# Altium PCB Tag.PcbDoc
Units mil, origin at the board's own origin, x right, y up, seen from the top; angles counter-clockwise.
Board outline 905.51 x 1657.48 mil, 2 copper layers (Top Layer, Bottom Layer); 19 components, 19 nets, 152 pads, 73 vias.
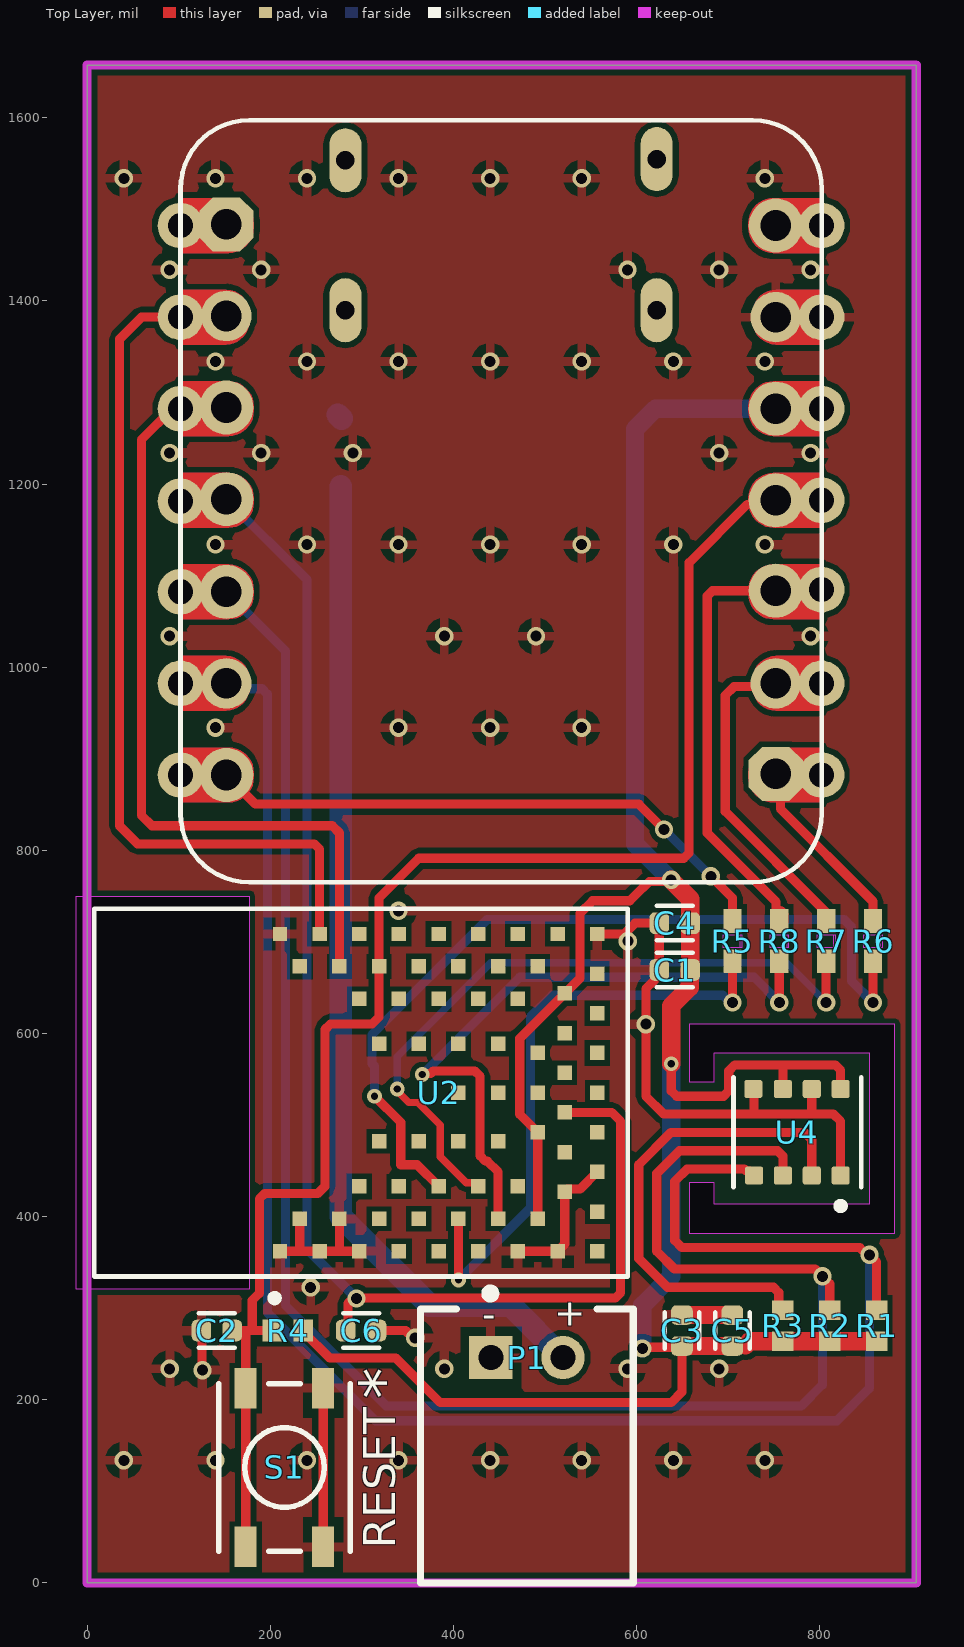
[diagram p0: Top Layer view]
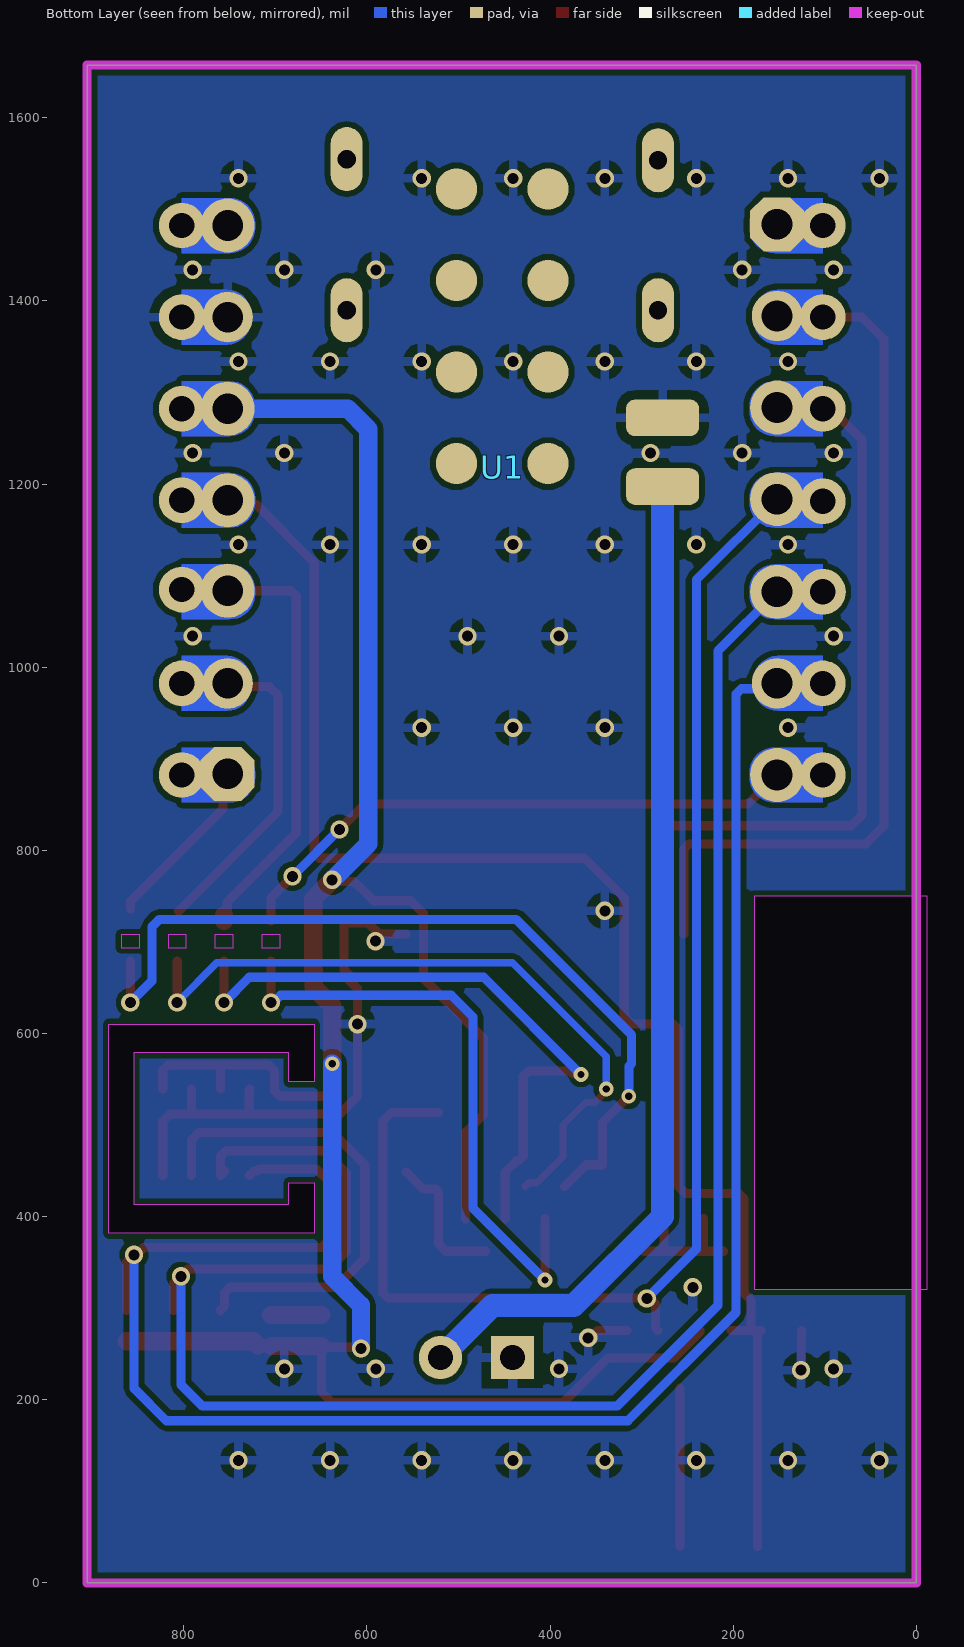
[diagram p1: Bottom Layer view, seen from below]
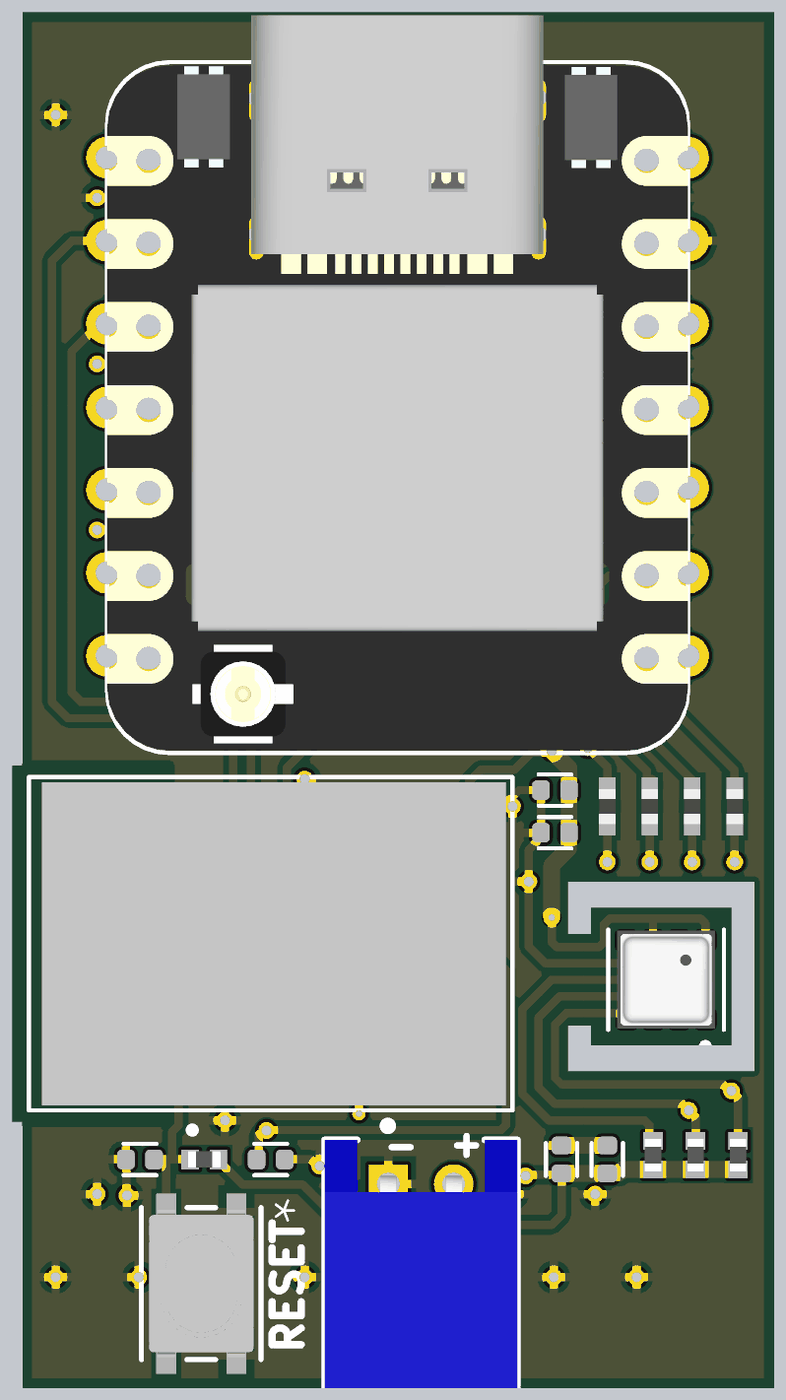
[diagram p2: 3D render of the assembled board from above, using the file's embedded part models]

## Layer stack, top to bottom
Top Solder: solder mask 0.4, Solder Resist, Dk 3.5
Top Layer: signal copper 1.4
Dielectric 1: dielectric 12.6, FR-4, Dk 4.8
Bottom Layer: signal copper 1.4
Bottom Solder: solder mask 0.4, Solder Resist, Dk 3.5

## Board outline
0,1657.48 905.51,1657.48 905.51,0 0,0
cut-out: 685.04,547.24 685.04,578.74 854.33,578.74 854.33,413.39 685.04,413.39 685.04,437.01 657.48,437.01 657.48,381.89 881.89,381.89 881.89,610.24 657.48,610.24 657.48,547.24
cut-out: 177.17,320.87 -11.81,320.87 -11.81,750 177.17,750

## Design rules (kind name [scope] priority, off if disabled: settings)
Clearance [All] p1: gap=6 ignorepadtopadclearanceinfootprint=TRUE
ComponentClearance [All] p1 off: gap=10 collisioncheckmode=3 verticalgap=10 showdistances=FALSE
Height [All] p1 off: minheight=0 maxheight=1000 prefheight=500
HoleToHoleClearance [All] p1: gap=4 allowstackedmicrovias=TRUE
MinimumSolderMaskSliver [All] p1 off: minsoldermaskwidth=4
PolygonConnect [All] p1: connectstyle=Relief reliefconductorwidth=10 reliefentries=4 polygonreliefangle="90 Angle" airgapwidth=10
RoomDefinition Tag [InComponentClass('Tag')] p1 off: confinementstyle=ConfineIn formatcopy=TRUE lockcomponents=FALSE outline -17.09,-1030.67 4167.91,-1030.67 4167.91,-15.67 -17.09,-15.67
RoutingVias [All] p1: holewidth=12 width=20 viastyle="Through Hole" minholewidth=12 minwidth=20 maxholewidth=12 maxwidth=20
SilkToSilkClearance [All] p1 off: silktosilkclearance=4
SilkToSolderMaskClearance [IsPad] p1 off: minsilkscreentomaskgap=4 clearancetoexposedcopper=TRUE
SolderMaskExpansion [All] p1: expansion=4 istentingtop=FALSE
Width [All] p1: maxlimit=30 minlimit=8 preferedwidth=20
24 further rules are at their usual default settings.

## Components (designator, comment, footprint, x,y, rotation, side; value= is the part's Value field where it differs from the comment)
C1 "CL05B104KP5NNNC" CAPC1005X55N 641.73,669.29 r180 top
C2 "CL05B104KP5NNNC" CAPC1005X55N 141.73,275.59 r180 top
C3 "CL05B104KP5NNNC" CAPC1005X55N 649.61,275.59 r90 top
C4 "CL05B104KP5NNNC" CAPC1005X55N 641.73,720.47 r180 top
C5 "CL05B104KP5NNNC" CAPC1005X55N 704.72,275.59 r90 top
C6 "CL05B104KP5NNNC" CAPC1005X55N 299.21,275.59 r0 top
P1 "S2B-PH-K-S(LF)(SN)" JST-S2B-PH-K-S_V 480.32,149.61 r0 top
R1 "RC1005F103CS" RESC1005X40N 862.2,280.79 r270 top
R2 "RC1005F103CS" RESC1005X40N 811.02,280.79 r270 top
R3 "RC1005F103CS" RESC1005X40N 759.84,280.79 r90 top
R4 "RC1005F103CS" RESC1005X40N 219.21,275.59 r180 top
R5 "0ohm" RC0402N_YAG 704.72,700.79 r90 top
R6 "0ohm" RC0402N_YAG 858.27,700.79 r90 top
R7 "0ohm" RC0402N_YAG 807.09,700.79 r90 top
R8 "0ohm" RC0402N_YAG 755.91,700.79 r90 top
S1 "PTS815 SJK 250 SMTR LFS" "SWITCH_SMTR LFS" 215.55,126.1 r270 top
U1 "XIAO ESP32S3" XIAO_ESP32S3 152.05,1483.51 r0 top
U2 "BM833" XCVR_BM833 303.15,535.43 r90 top
U4 "BME680" PSON80P300X300X100-8N 775.59,492.13 r270 top

## Footprints (in the part's own frame and the unit in brackets; to place one, negate y for a bottom-side part, rotate by r counter-clockwise, add the part's x,y. Pads: shape width x height; smd on the part's side, far side on the other; paste and mask are expansions set on the pad)
CAPC1005X55N [mm]
  rrect53% 0.54x0.6 smd: 1(-0.43,0) 2(0.43,0)
  silkscreen extent -0.5,-0.48 0.5,0.48
JST-S2B-PH-K-S_V [mm] "THD, 2-Leads, Body 7.6x5.9mm, Pitch 2mm"
  rect 1.2x1.2 hole 0.7: 1(-1,2.45)
  round 1.2 hole 0.7: 2(1,2.45)
  silkscreen extent -2.95,-3.8 2.95,4.35, body extent -2.95,-3.8 2.95,3.8, height 4.8
PSON80P300X300X100-8N [mm]
  rrect25% 0.5x0.5 smd: 1(1.2,1.2) 2(1.2,0.4) 3(1.2,-0.4) 4(1.2,-1.2) 5(-1.2,-1.22) 6(-1.2,-0.4) 7(-1.2,0.4) 8(-1.2,1.2)
  silkscreen extent -1.53,-1.77 2.14,1.77, body extent -1.5,-1.5 1.5,1.5, height 1
RC0402N_YAG [mil]
  rect 26x20 smd paste+0 mask+0: 1(-22,0) 2(22,0)
  Top Layer keep-out region: -7,-8 -7,8 7,8 7,-8
  Keep-Out Layer region: -7,-10 -7,10 7,10 7,-10
  body extent -21,-10 21,10, height 28
RESC1005X40N [mm]
  rect 0.54x0.6 smd: 1(-0.432,0) 2(0.432,0)
  body extent -0.5,-0.25 0.5,0.25, height 0.4
"SWITCH_SMTR LFS" [mil]
  rect 44x24 smd paste+0 mask+0: 1(-86.5,42.32) 2(86.5,42.32) 3(-86.5,-42.32) 4(86.5,-42.32)
  silkscreen extent -92,-72 92,72, body extent -89,-63 89,63, height 98
XCVR_BM833 [mm]
  rect 0.4x0.4 smd: 1(-4.4,2.35) 2(-3.5,1.8) 3(-4.4,1.25) 4(-3.5,0.7) 5(-4.4,0.15) 6(-3.5,-0.4) 7(-4.4,-0.95) 8(-3.5,-1.5) 9(-4.4,-2.05) 10(-3.5,-2.6) 11(-4.4,-3.15) 12(-3.5,-3.7) 13(-4.4,-4.25) 14(-3.5,-4.8) 15(-4.4,-5.35) 16(-4.4,-6.45) 17(-3.3,-6.45) 18(-2.75,-5.55) 19(-2.2,-6.45) 20(-1.65,-5.55) 21(-1.1,-6.45) 22(-0.55,-5.55) 23(0,-6.45) 24(0.55,-5.55) 25(1.1,-6.45) 26(1.65,-5.55) 27(2.2,-6.45) 28(2.75,-5.55) 29(3.3,-6.45) 30(4.4,-6.45) 31(4.4,-5.35) 32(3.5,-4.8) 33(4.4,-4.25) 34(3.5,-3.7) 35(4.4,-3.15) 36(3.5,-2.6) 37(4.4,-2.05) 38(3.5,-1.5) 39(4.4,-0.95) 40(3.5,-0.4) 41(4.4,0.15) 42(3.5,0.7) 43(4.4,1.25) 44(3.5,1.8) 45(4.4,2.35) 46(1.35,-0.4) 47(-1.35,-0.4) 48(-2.6,0.15) 49(-2.6,-0.95) 50(-1.35,-1.5) 51(-2.6,-2.05) 52(-1.35,-2.6) 53(-2.6,-3.15) 54(-1.35,-3.7) 55(-2.6,-4.25) 56(-1.1,-4.8) 57(0,-4.8) 58(1.1,-4.8) 59(2.6,-4.25) 60(1.35,-3.7) 61(2.6,-3.15) 62(1.35,-2.6) 63(2.6,-2.05) 64(1.35,-1.5) 65(2.6,-0.95) 66(2.6,0.15) 67(0,-3.7) 68(0,-2.6)
  silkscreen extent -5.8,-7.3 5.1,7.5, body extent -4.95,-7.1 4.95,7.1, height 2
XIAO_ESP32S3 [mil]
  round 50 hole 27.56: 1(-50,-1.25) 2(-50,-101.25) 3(-50,-201.25) 4(-50,-302.3) 5(-50,-401.25) 6(-50,-501.25) 7(-50,-601.25) 8(650,-601.25) 9(650,-501.25) 10(650,-398.79) 11(650,-301.25) 12(650,-201.25) 13(650,-101.25) 14(650,-1.25)
  oct 59.06x59.06 / inner round 54.56 / far side oct 59.06x59.06 hole 33.46: 1(0,0) 8(600,-600)
  round 55.12 hole 33.46: 2(0,-100) 6(0,-501.25) 9(600,-501.25) 13(600,-101.25)
  round 59.06 hole 33.46: 3(0,-200) 4(0,-300) 5(0,-401.25) 7(0,-601.25) 10(600,-400) 11(600,-301.25) 12(600,-201.25) 14(600,-1.25)
  rrect100% 45x45 smd far side paste+0: 15(250,38.75) 16(250,-61.25) 17(250,-161.25) 18(250,-261.25) 19(350,-261.25) 20(350,-161.25) 21(350,-61.25) 22(350,38.75)
  rrect50% 80x40 smd far side: BAT+(125,-286.25) BAT-(125,-211.25)
  oval 35x70 hole 20: S1(470,71.25) S2(130,70) S3(470,-93.75) S4(130,-93.75)
  Top Layer region: 650,-631.25 597.5,-631.25 586.98,-629.16 578.05,-623.2 572.09,-614.27 570,-603.75 570,-603.75 570,-598.75 572.09,-588.23 578.05,-579.3 586.98,-573.34 597.5,-571.25 597.5,-571.25 650,-571.25
  Top Layer region: 650,-531.25 600,-531.25 586.87,-527.21 577.53,-517.14 574.47,-503.75 574.47,-503.75 574.47,-498.75 577.53,-485.36 586.87,-475.29 600,-471.25 600,-471.25 650,-471.25
  Top Layer region: 650,-431.25 597.5,-431.25 586.98,-429.16 578.05,-423.2 572.09,-414.27 570,-403.75 570,-403.75 570,-398.75 572.09,-388.23 578.05,-379.3 586.98,-373.34 597.5,-371.25 597.5,-371.25 650,-371.25
  Top Layer region: 650,-331.25 597.5,-331.25 586.98,-329.16 578.05,-323.2 572.09,-314.27 570,-303.75 570,-303.75 570,-298.75 572.09,-288.23 578.05,-279.3 586.98,-273.34 597.5,-271.25 597.5,-271.25 650,-271.25
  Top Layer region: 650,-231.25 597.5,-231.25 586.98,-229.16 578.05,-223.2 572.09,-214.27 570,-203.75 570,-203.75 570,-198.75 572.09,-188.23 578.05,-179.3 586.98,-173.34 597.5,-171.25 597.5,-171.25 650,-171.25
  Top Layer region: 650,-131.25 600,-131.25 586.87,-127.21 577.53,-117.14 574.47,-103.75 574.47,-103.75 574.47,-98.75 577.53,-85.36 586.87,-75.29 600,-71.25 600,-71.25 650,-71.25
  Top Layer region: 650,-31.25 597.5,-31.25 586.98,-29.16 578.05,-23.2 572.09,-14.27 570,-3.75 570,-3.75 570,1.25 572.09,11.77 578.05,20.7 586.98,26.66 597.5,28.75 597.5,28.75 650,28.75
  Top Layer region: -50,28.75 2.5,28.75 13.02,26.66 21.95,20.7 27.91,11.77 30,1.25 30,1.25 30,-3.75 27.91,-14.27 21.95,-23.2 13.02,-29.16 2.5,-31.25 2.5,-31.25 -50,-31.25
  Top Layer region: -50,-71.25 0,-71.25 13.13,-75.29 22.47,-85.36 25.53,-98.75 25.53,-98.75 25.53,-103.75 23.89,-113.97 18.46,-122.79 10.07,-128.85 0,-131.25 0,-131.25 -50,-131.25
  Top Layer region: -50,-171.25 2.5,-171.25 13.02,-173.34 21.95,-179.3 27.91,-188.23 30,-198.75 30,-198.75 30,-203.75 27.91,-214.27 21.95,-223.2 13.02,-229.16 2.5,-231.25 2.5,-231.25 -50,-231.25
  Top Layer region: -50,-271.25 2.5,-271.25 13.02,-273.34 21.95,-279.3 27.91,-288.23 30,-298.75 30,-298.75 30,-303.75 27.91,-314.27 21.95,-323.2 13.02,-329.16 2.5,-331.25 2.5,-331.25 -50,-331.25
  Top Layer region: -50,-371.25 2.5,-371.25 13.02,-373.34 21.95,-379.3 27.91,-388.23 30,-398.75 30,-398.75 30,-403.75 27.91,-414.27 21.95,-423.2 13.02,-429.16 2.5,-431.25 2.5,-431.25 -50,-431.25
  Top Layer region: -50,-471.25 0,-471.25 13.13,-475.29 22.47,-485.36 25.53,-498.75 25.53,-498.75 25.53,-503.75 23.89,-513.97 18.46,-522.79 10.07,-528.85 0,-531.25 0,-531.25 -50,-531.25
  Top Layer region: -50,-571.25 2.5,-571.25 13.02,-573.34 21.95,-579.3 27.91,-588.23 30,-598.75 30,-598.75 30,-603.75 27.91,-614.27 21.95,-623.2 13.02,-629.16 2.5,-631.25 2.5,-631.25 -50,-631.25
  Bottom Layer region: 650,-571.25 597.5,-571.25 586.98,-573.34 578.05,-579.3 572.09,-588.23 570,-598.75 570,-598.75 570,-603.75 572.09,-614.27 578.05,-623.2 586.98,-629.16 597.5,-631.25 597.5,-631.25 650,-631.25
  Bottom Layer region: 650,-471.25 600,-471.25 586.87,-475.29 577.53,-485.36 574.47,-498.75 574.47,-498.75 574.47,-503.75 577.53,-517.14 586.87,-527.21 600,-531.25 600,-531.25 650,-531.25
  Bottom Layer region: 650,-371.25 597.5,-371.25 586.98,-373.34 578.05,-379.3 572.09,-388.23 570,-398.75 570,-398.75 570,-403.75 572.09,-414.27 578.05,-423.2 586.98,-429.16 597.5,-431.25 597.5,-431.25 650,-431.25
  Bottom Layer region: 650,-271.25 597.5,-271.25 586.98,-273.34 578.05,-279.3 572.09,-288.23 570,-298.75 570,-298.75 570,-303.75 572.09,-314.27 578.05,-323.2 586.98,-329.16 597.5,-331.25 597.5,-331.25 650,-331.25
  Bottom Layer region: 650,-171.25 597.5,-171.25 586.98,-173.34 578.05,-179.3 572.09,-188.23 570,-198.75 570,-198.75 570,-203.75 572.09,-214.27 578.05,-223.2 586.98,-229.16 597.5,-231.25 597.5,-231.25 650,-231.25
  Bottom Layer region: 650,-71.25 600,-71.25 586.87,-75.29 577.53,-85.36 574.47,-98.75 574.47,-98.75 574.47,-103.75 577.53,-117.14 586.87,-127.21 600,-131.25 600,-131.25 650,-131.25
  Bottom Layer region: 650,28.75 597.5,28.75 586.98,26.66 578.05,20.7 572.09,11.77 570,1.25 570,1.25 570,-3.75 572.09,-14.27 578.05,-23.2 586.98,-29.16 597.5,-31.25 597.5,-31.25 650,-31.25
  Bottom Layer region: -50,-31.25 2.5,-31.25 13.02,-29.16 21.95,-23.2 27.91,-14.27 30,-3.75 30,-3.75 30,1.25 27.91,11.77 21.95,20.7 13.02,26.66 2.5,28.75 2.5,28.75 -50,28.75
  Bottom Layer region: -50,-131.25 0,-131.25 10.07,-128.85 18.46,-122.79 23.89,-113.97 25.53,-103.75 25.53,-103.75 25.53,-98.75 22.47,-85.36 13.13,-75.29 0,-71.25 0,-71.25 -50,-71.25
  Bottom Layer region: -50,-231.25 2.5,-231.25 13.02,-229.16 21.95,-223.2 27.91,-214.27 30,-203.75 30,-203.75 30,-198.75 27.91,-188.23 21.95,-179.3 13.02,-173.34 2.5,-171.25 2.5,-171.25 -50,-171.25
  Bottom Layer region: -50,-331.25 2.5,-331.25 13.02,-329.16 21.95,-323.2 27.91,-314.27 30,-303.75 30,-303.75 30,-298.75 27.91,-288.23 21.95,-279.3 13.02,-273.34 2.5,-271.25 2.5,-271.25 -50,-271.25
  Bottom Layer region: -50,-431.25 2.5,-431.25 13.02,-429.16 21.95,-423.2 27.91,-414.27 30,-403.75 30,-403.75 30,-398.75 27.91,-388.23 21.95,-379.3 13.02,-373.34 2.5,-371.25 2.5,-371.25 -50,-371.25
  Bottom Layer region: -50,-531.25 0,-531.25 10.07,-528.85 18.46,-522.79 23.89,-513.97 25.53,-503.75 25.53,-503.75 25.53,-498.75 22.47,-485.36 13.13,-475.29 0,-471.25 0,-471.25 -50,-471.25
  Bottom Layer region: -50,-631.25 2.5,-631.25 13.02,-629.16 21.95,-623.2 27.91,-614.27 30,-603.75 30,-603.75 30,-598.75 27.91,-588.23 21.95,-579.3 13.02,-573.34 2.5,-571.25 2.5,-571.25 -50,-571.25
  silkscreen extent -50,-718 650,114, body extent -50,-715 650,170, height 166

## Part data
C1 C2 C3 C4 C5 C6: "0.1ÂµF Â±10% 10V Ceramic Capacitor X7R 0402 _1005 Metric_", Package="0402 Samsung", Availability=Unavailable, MF="Samsung Electro-Mechanics", MP=CL05B104KP5NNNC, Price=None, SnapEDA_Link=https://www.snapeda.com/parts/CL05B104KP5NNNC/Samsung%20Electro-Mechanics/view-part/1365387/?ref=snap
P1: library part CMP-1755-00004-1, "Male Header, Pitch 2 mm, 1 x 2 Position, Height 4.8 mm, Tail Length 3.4 mm, -25 to 85 degC, RoHS, Bulk", Capacitance="10 uF", Case\Package=Radial, Max Operating Temperature="85 degC", Min Operating Temperature="-40 degC", Package Quantity=200, Tolerance=20%, Voltage Rating="50 V", ComponentLink1Description=Datasheet, ComponentLink1URL=http://www.jst-mfg.com/product/pdf/eng/ePH.pdf, DatasheetVersion=Dec-12, Diameter="5 mm", Height="11 mm", Lead Pitch="2 mm", Length="11 mm", Mount="Through Hole", PackageDescription="Male Header, Pitch 2 mm, 1 x 2 Position, Height 4.8 mm, Tail Length 3.4 mm", PackageReference=S2B-PH-K-S, Packaging=Bulk, Pins=2, Radiation Hardening=No, REACH SVHC="No SVHC", RoHSCompliant=true, Voltage Rating (DC)="50 V"
R1 R2 R3 R4: "10 kOhms Â±1% 0.063W, 1/16W Chip Resistor 0402 (1005 Metric) Moisture Resistant Thick Film", Package="1005 Panasonic Electronic Components", Availability="In Stock", Check_prices=https://www.snapeda.com/parts/RC1005F103CS/Samsung+Electro-Mechanics/view-part/?ref=eda, MF="Samsung Electro-Mechanics", MP=RC1005F103CS, Price=None, Purchase-URL=https://pricing.snapeda.com/search/part/RC1005F103CS/?ref=eda, SnapEDA_Link=https://www.snapeda.com/parts/RC1005F103CS/Samsung+Electro-Mechanics/view-part/?ref=snap
R5 R6 R7 R8: library part RC0402JR-070RL, "No Description Available", Mfr_Name=Yageo
S1: "No Description Available", Mfr_Name="C&K Components", RefDes=RefDes, Type=Type
U1: library part XIAO_ESP32S3
U2: "802.15.4, Bluetooth Bluetooth v5.1 Transceiver Module 2.4GHz PCB Trace Surface Mount", Package=None, Availability="In Stock", Check_prices=https://www.snapeda.com/parts/BM833/Fanstel/view-part/?ref=eda, MF=Fanstel, MP=BM833, Price=None, Purchase-URL=https://pricing.snapeda.com/search/part/BM833/?ref=eda, SnapEDA_Link=https://www.snapeda.com/parts/BM833/Fanstel/view-part/?ref=snap
U4: "Gas, Humidity, Pressure, Temperature Sensor IÂ²C, SPI Output", Package="LGA-8 Bosch Tools", Availability="In Stock", Check_prices=https://www.snapeda.com/parts/BME680/Bosch+Sensortec/view-part/?ref=eda, MF="Bosch Sensortec", MP=BME680, Price=None, Purchase-URL=https://pricing.snapeda.com/search/part/BME680/?ref=eda, SnapEDA_Link=https://www.snapeda.com/parts/BME680/Bosch+Sensortec/view-part/?ref=snap

## Via types
v1: diameter 20, hole 12, Top Layer to Bottom Layer, 68 vias
v2: diameter 16, hole 8, Top Layer to Bottom Layer, 5 vias

## Nets (pads, with @x,y where several pads share a name; then routed paths per layer and width w, separated by ;. In a path a pad name is that pad's centre, name@x,y a point inside that pad or via, vN(x,y) a via of type N, cw(c..) or ccw(c..) an arc to the next point about the centre after c; other vN are vias at no path point)
+3V3: C1.1 C3.1 C4.1 C5.1 R1.2 R2.2 R3.1 R4.1 U1.12 U2.14 U2.28 U2.56 U4.6 U4.8 | length 2736.5
  Top Layer w10: R4.1 236.22,274.41 265.03,245.6 337.08,245.6 385.83,196.85 637.8,196.85 649.61,208.66 C3.1 648.23,257.28 607.68,257.28 v1(606.3,255.91) ; U2.14 U2.56 472.44,511.81 472.44,594.49 U2.28 538.21,660.26 538.21,731.13 552.06,744.97 592.66,744.97 607.28,759.59 607.8,759.59 614.01,765.8 635.88,765.8 v1(637.8,767.72) ; v2@637.99,566.74 637.99,537.35 643.84,531.5 694.93,531.5 700.79,537.35 700.79,559.06 707.44,565.71 759.84,565.71 ; U4.6 759.84,565.71 ; U4.8 822.83,559.85 816.98,565.71 759.84,565.71
  Top Layer w15: v2(637.8,566.93) v2@637.99,566.74
  Top Layer w20: v2(637.8,566.93) 637.8,629.92 658.03,650.16 658.03,668.66 C1.1 C4.1 658.66,746.85 v1(637.8,767.72) ; C3.1 C5.1 ; 718.92,259.29 723.41,263.78 R3.1 R2.2 R1.2
  Bottom Layer w20: v1(606.3,255.91) 606.3,303.15 637.8,334.65 v2(637.8,566.93) ; v1(637.8,767.72) 598.43,807.09 598.43,1259.84 620.85,1282.26 U1.12@752.05,1282.26
+5V: U1.14
BAT+: P1.2 U1.BAT+ | length 1103.6
  Bottom Layer w25: U1.BAT+ 277.05,400.12 374.02,303.15 462.6,303.15 P1.2
ESP_CTS: R8.2 U1.10 | length 471.2
  Top Layer w10: U1.10@752.05,1083.51 683.02,1083.51 677.17,1077.66 677.17,818.9 752.48,743.58 752.48,726.21 R8.2
  Top Layer w20: R8.2 R8.2@755.91,729.23
ESP_RTS: R7.2 U1.9 | length 341.1
  Top Layer w10: U1.9@748.59,978.81 706.42,978.81 696.85,969.24 696.85,842.52 R7.2@805.61,733.76
  Top Layer w20: U1.9@748.59,978.81 U1.9@752.04,982.26
ESP_RX: R6.2 U1.8 | length 191.3
  Top Layer w10: U1.8@757.05,878.51 757.05,845.32 858.27,744.09 858.27,736.22
  Top Layer w20: U1.8@752.05,883.51 U1.8@757.05,878.51
ESP_TX: R5.2 U1.7 | length 633.5
  Top Layer w10: U1.7@152.04,882.26 183.91,850.39 602.36,850.39 v1(629.92,822.83) ; v1(681.1,771.65) 704.72,748.03 R5.2
  Bottom Layer w10: v1(629.92,822.83) v1(681.1,771.65)
GND: C1.2 C2.2 C3.2 C4.2 C5.2 C6.2 P1.1 S1.1 S1.2 U1.13 U1.BAT- U2.1 U2.2 U2.3 U2.4 U2.5 U2.13 U2.15 U2.18 U2.19 U2.30 U2.45 U4.1 U4.5 U4.7 | length 1242
  Top Layer w10: C2.2 125.39,275 125.39,232.87 v1(125.98,232.28) ; U2.1 232.28,362.2 ; U2.2 232.28,362.2 ; S1.2 S1.1 ; U2.4 275.59,362.2 ; U2.5 275.59,362.2 ; C6.2 347.69,275.59 355.56,267.72 v1(358.27,267.72) ; U2.13 U2.15 521.65,370.08 U2.18 524.53,430.04 538.31,430.04 U2.19 ; U2.30 586.61,708.66 598.42,720.47 C4.2 C1.2 619.56,664.05 619.56,658.08 610.24,648.75 v1(610.24,610.24) 610.24,531.5 629.72,512.01 728.35,512.01 ; U4.5 728.35,538.58 728.35,512.01 ; U4.7 791.34,512.01 ; U4.1 822.83,503.94 814.76,512.01 791.34,512.01 ; 232.28,362.2 U2.3 275.59,362.2 ; 728.35,512.01 791.34,512.01
  Top Layer w20: C3.2 C5.2
  Bottom Layer w25: U1.BAT-@273.72,1275.59 U1.BAT- U1.BAT-@277.66,1271.65
  other v1: 40.16,133.86 140.16,133.86 240.16,133.86 340.16,133.86 440.16,133.86 540.16,133.86 640.16,133.86 740.16,133.86 90.16,233.86 390.16,233.86 590.16,233.86 690.16,233.86 244.09,322.83 590.55,700.79 340.16,733.86 140.16,933.86 340.16,933.86 440.16,933.86 540.16,933.86 90.16,1033.86 390.16,1033.86 490.16,1033.86 790.16,1033.86 140.16,1133.86 240.16,1133.86 340.16,1133.86 440.16,1133.86 540.16,1133.86 640.16,1133.86 740.16,1133.86 90.16,1233.86 190.16,1233.86 290.16,1233.86 690.16,1233.86 790.16,1233.86 140.16,1333.86 240.16,1333.86 340.16,1333.86 440.16,1333.86 540.16,1333.86 640.16,1333.86 740.16,1333.86 90.16,1433.86 190.16,1433.86 590.16,1433.86 690.16,1433.86 790.16,1433.86 40.16,1533.86 140.16,1533.86 240.16,1533.86 340.16,1533.86 440.16,1533.86 540.16,1533.86 740.16,1533.86
NetR3_2: R3.2 U4.2 | length 538
  Top Layer w10: R3.2 755.37,302.27 755.37,316.98 749.51,322.83 633.86,322.83 602.36,354.33 602.36,456.69 637.68,492.01 783.46,492.01 791.34,484.13 U4.2
NRF_CTS: R7.1 U2.53 | length 763.4
  Top Layer w8: v2(338.58,539.37) 338.58,537.21 351.12,524.67 361.16,524.67 385.83,500 385.83,465.32 414.2,436.94 423.29,436.94 U2.53
  Top Layer w10: v1(807.09,633.86) R7.1
  Bottom Layer w8: v2(338.58,539.37) 338.58,574.8 440.94,677.17 763.78,677.17 v1(807.09,633.86)
NRF_RTS: R8.1 U2.12 | length 723.7
  Top Layer w10: v2@367.29,553.97 v2(366.14,555.12) 367.29,556.27 375.16,556.27 377.95,559.06 423.28,559.06 429.13,553.2 429.13,466.49 434.99,460.63 437.01,460.63 448.82,448.82 U2.12 ; v1(755.91,633.86) R8.1
  Bottom Layer w10: v2(366.14,555.12) 472.44,661.42 728.35,661.42 v1(755.91,633.86)
NRF_RX: R5.1 U2.10 | length 665.4
  Top Layer w10: v2(405.51,330.71) U2.10 ; v1(704.72,633.86) R5.1
  Bottom Layer w10: v2(405.51,330.71) 484.25,409.45 484.25,618.11 507.87,641.73 694.14,641.73 702.02,633.86 v1(704.72,633.86)
NRF_TX: R6.1 U2.51 | length 922.4
  Top Layer w10: v2(313.9,531.5) 342.52,502.88 342.52,456.69 360.24,456.69 U2.51 ; v1(858.27,633.86) R6.1
  Bottom Layer w10: v2(313.9,531.5) 313.9,564.33 311.02,567.21 311.02,598.43 437.01,724.41 826.77,724.41 834.65,716.54 834.65,657.48 v1(858.27,633.86)
RESET: C2.1 R4.2 S1.3 S1.4 U1.11 U2.40 | length 1671.1
  Top Layer w10: S1.4 S1.3 173.23,271.91 169.55,275.59 180.43,275.59 ; R4.2 180.43,275.59 ; U1.11@752.04,1182.26 747.52,1177.74 721.04,1177.74 657.48,1114.17 657.48,797.2 651.62,791.34 362.2,791.34 318.9,748.03 U2.40 318.9,618.11 311.02,610.24 265.7,610.24 259.84,604.38 259.84,433.07 251.97,425.2 194.02,425.2 188.17,419.34 188.17,316.31 180.43,308.58 180.43,275.59
  Bottom Layer w10: U1.11@740.09,1182.26 U1.11@752.04,1182.26
SCL: R1.1 U1.6 U4.4 | length 2034.2
  Top Layer w10: U4.4 723.5,449.72 719.93,449.72 717.65,452.01 655.2,452.01 641.73,438.54 641.73,374.02 649.61,366.14 843.75,366.14 851.62,358.27 v1(854.33,358.27) 862.2,350.39 R1.1
  Bottom Layer w10: U1.6@152.04,982.26 157.93,976.38 190.99,976.38 196.85,970.52 196.85,295.28 314.96,177.17 818.9,177.17 854.33,212.6 v1(854.33,358.27)
SDA: R2.1 U1.5 U4.3 | length 2057.2
  Top Layer w10: U4.3@755,449.72 U4.3 ; U4.3@759.84,449.72 759.84,466.15 753.98,472.01 646.92,472.01 622.05,447.14 622.05,362.2 641.42,342.83 794.96,342.83 v1(802.99,334.8) 811.02,326.77 R2.1
  Bottom Layer w10: U1.5@152.04,1082.26 216.54,1017.77 216.54,303.15 326.52,193.17 779.78,193.17 802.99,216.38 v1(802.99,334.8)
SW2: C6.1 U1.4 U2.22 | length 1517.3
  Top Layer w10: C6.1 284.87,278.18 284.87,305.17 290.73,311.02 576.82,311.02 582.68,316.88 582.68,503.94 572.83,513.78 U2.22
  Bottom Layer w10: U1.4@152.05,1183.51 240.16,1095.4 240.16,364.6 v1(294.22,310.54)
SWCLK: U1.3 U2.42 | length 836.8
  Top Layer w10: U1.3@102.05,1282.26 93.29,1282.26 59.31,1248.28 59.31,838.33 70.87,826.77 267.72,826.77 275.59,818.9 U2.42
SWDIO: U1.2 U2.43 | length 929.7
  Top Layer w10: U1.2@102.05,1382.26 59.43,1382.26 35.43,1358.27 35.43,826.77 55.12,807.09 248.03,807.09 253.94,801.18 U2.43
pads on no net: U1.1 U1.15 U1.16 U1.17 U1.18 U1.19 U1.20 U1.21 U1.22 U1.S1 U1.S2 U1.S3 U1.S4 U2.6 U2.7 U2.8 U2.9 U2.11 U2.16 U2.17 U2.20 U2.21 U2.23 U2.24 U2.25 U2.26 U2.27 U2.29 U2.31 U2.32 U2.33 U2.34 U2.35 U2.36 U2.37 U2.38 U2.39 U2.41 U2.44 U2.46 U2.47 U2.48 U2.49 U2.50 U2.52 U2.54 U2.55 U2.57 U2.58 U2.59 U2.60 U2.61 U2.62 U2.63 U2.64 U2.65 U2.66 U2.67 U2.68

## Polygon pours and split planes (outlines as drawn)
GND on Bottom Layer "GND_L02_P003" (solid, pour order 3): 0,1657.48 905.51,1657.48 905.51,0 0,0
GND on Top Layer "GND_L01_P002" (solid, pour order 2): 0,1657.48 905.51,1657.48 905.51,0 0,0

## Keep-outs
Keep-Out Layer:
  the board outline again, w10

## Silkscreen, mask and mechanical layers (free items; w line width, h text height)
Top Overlay:
  text "+" at 510,280.59 h30
  text "-" at 431.26,278.47 h30
  text "RESET" at 336.46,37.56 h35 r90

## Dimensions
0,1657.48 to 0,0 on Bottom 3D Body
0,1657.48 to 905.51,1657.48 on Bottom 3D Body

## Text inside footprints (layer, text, board x,y; h text height)
S1: Top Overlay "*" at 276.87,235.1 h50 r270; Mechanical 13 "*" at 216.87,210.1 h50 r270